# Altium PCB Prometheus_ADTC_V1.1.PcbDoc
Units mil, origin at the board's own origin, x right, y up, seen from the top; angles counter-clockwise.
Board outline 3345 x 2190 mil, 2 copper layers (Top Layer, Bottom Layer); 12 components, 7 nets, 104 pads, 0 vias.
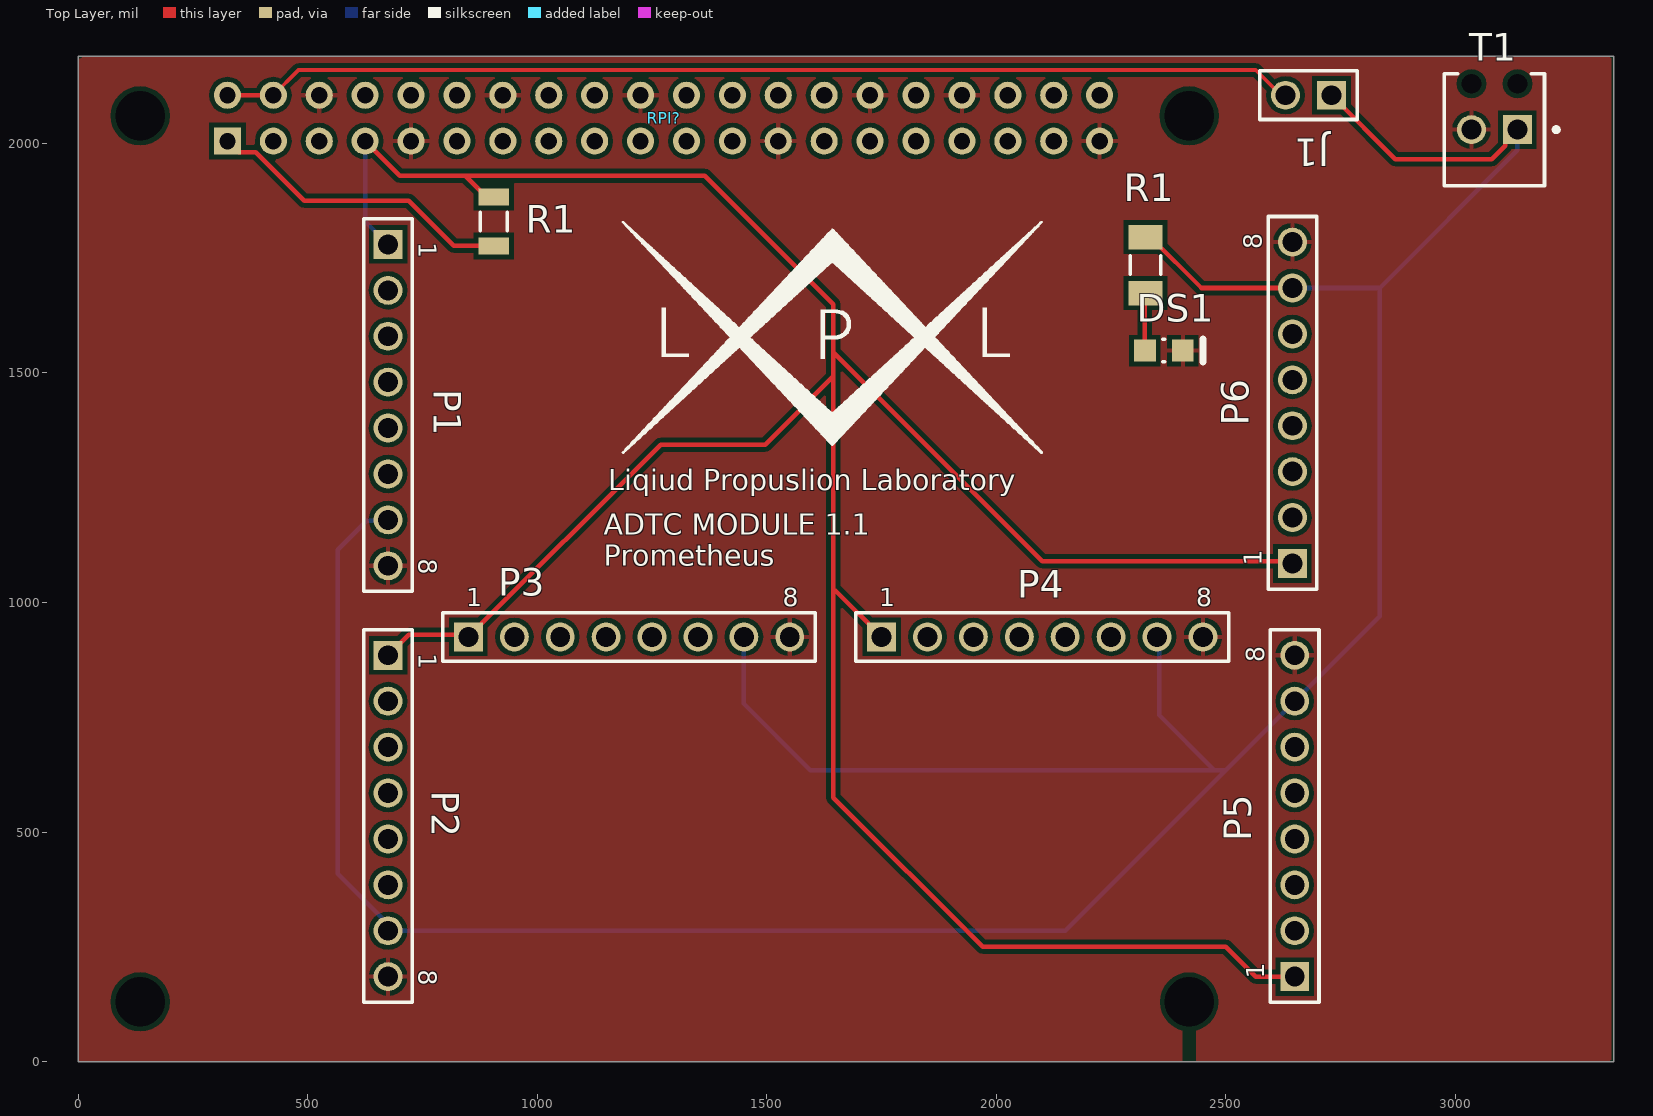
[diagram p0: Top Layer view]
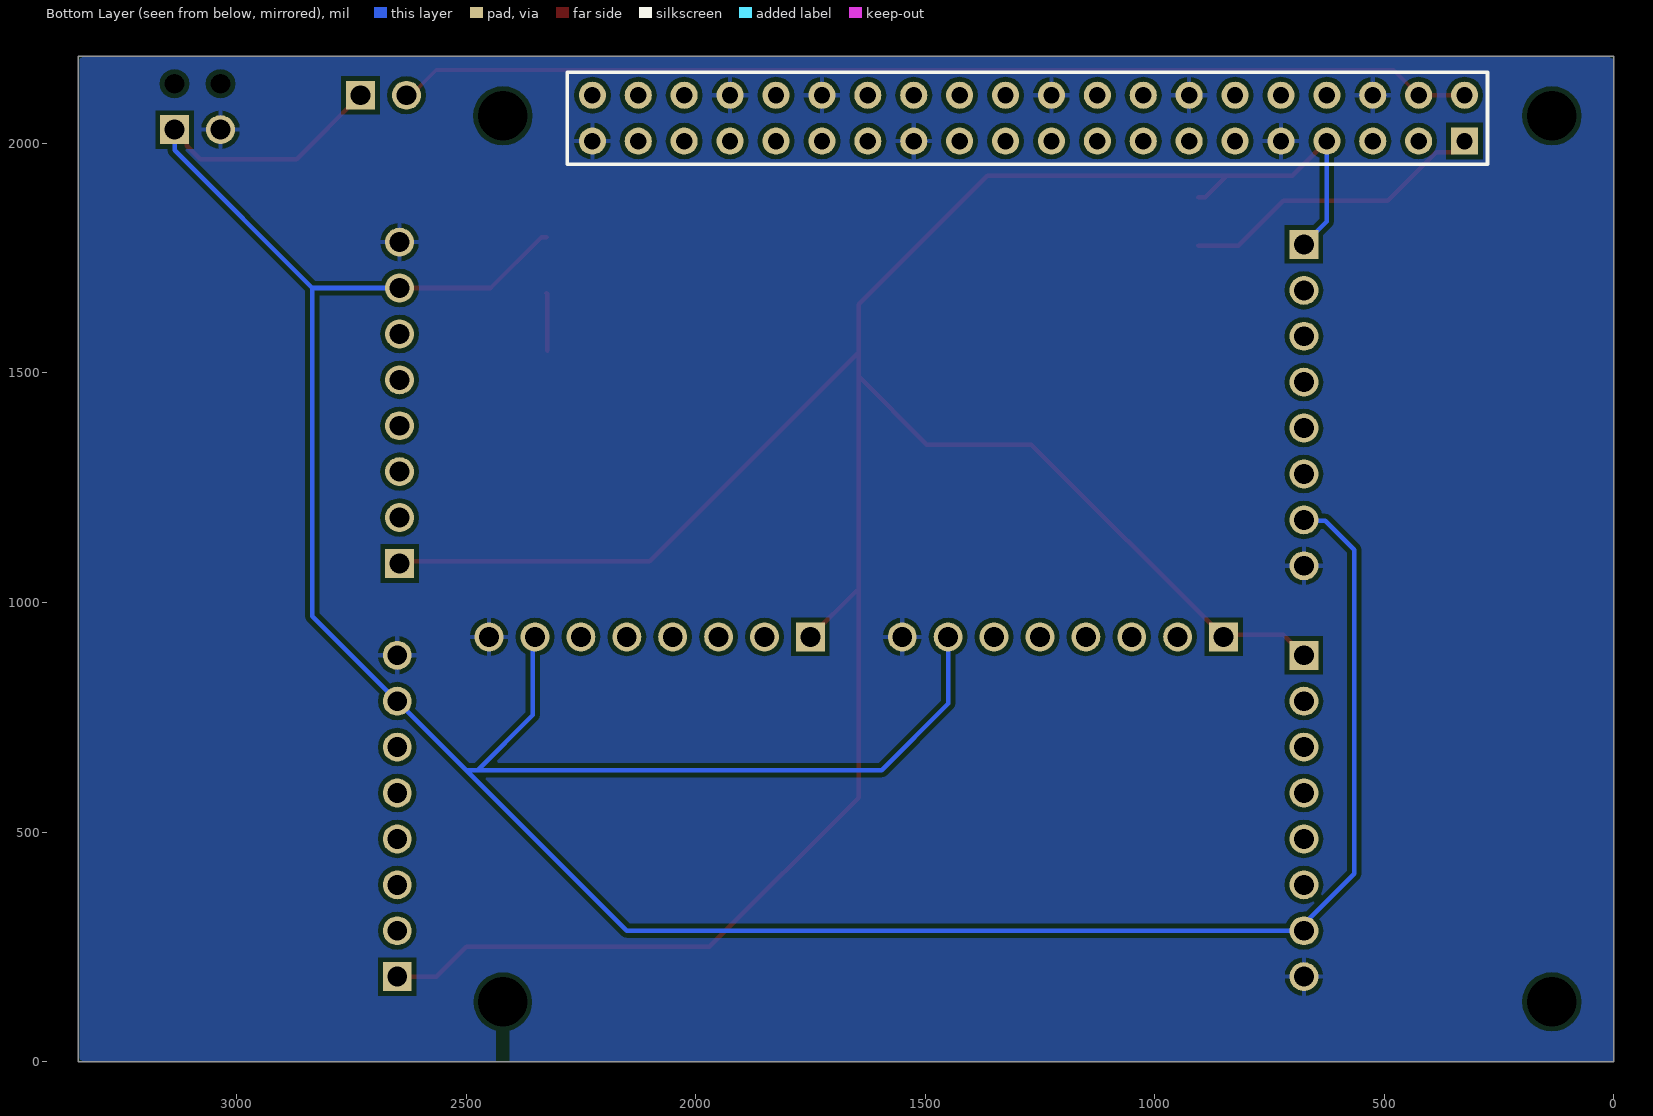
[diagram p1: Bottom Layer view, seen from below]

## Layer stack, top to bottom
Top Solder: solder mask 0.4, Solder Resist, Dk 3.5
Top Layer: signal copper 1.4
Dielectric 1: dielectric 12.6, FR-4, Dk 4.8
Bottom Layer: signal copper 1.4
Bottom Solder: solder mask 0.4, Solder Resist, Dk 3.5

## Board outline
0,0 3345,0 3345,2190 0,2190

## Design rules (kind name [scope] priority, off if disabled: settings)
Clearance [All] p1: gap=10 ignorepadtopadclearanceinfootprint=FALSE except(0: Arc-Hole Track-Hole SMDPad-Hole THPad-Hole Via-Hole Fill-Hole Poly-Hole Region-Hole Text-Hole)
HoleSize [All] p1: absolutevalues=TRUE maxlimit=200 minlimit=1 maxpercent=80.000 minpercent=20.000
PolygonConnect [All] p1: connectstyle=Relief reliefconductorwidth=10 reliefentries=4 polygonreliefangle="90 Angle" airgapwidth=10
RoomDefinition Prometheus_ADTC_V1.1 [InComponentClass('Prometheus_ADTC_V1.1')] p1: confinementstyle=ConfineIn formatcopy=TRUE lockcomponents=FALSE outline -110,-145 3735,-145 3735,2375 -110,2375
RoutingVias [All] p1: holewidth=28 width=50 viastyle="Through Hole" minholewidth=28 minwidth=50 maxholewidth=28 maxwidth=50
SolderMaskExpansion [All] p1: expansion=4
Width [All] p1: maxlimit=10 minlimit=8 preferedwidth=10 minimp=50.000000 maximp=50.000000 favimp=50.000000
29 further rules are at their usual default settings.

## Classes and differential pairs
component class Prometheus_ADTC_V1.1: DS1 J1 P1 P2 P3 P4 P5 P6 R1 RPI? T1

## Components (designator, comment, footprint, x,y, rotation, side; value= is the part's Value field where it differs from the comment)
DS1 "LTST-C170KRKT" LTST-C170KRKT_V 2365,1548.75 r0 top
J1 "61300211121" 61300211121 2680,2105 r180 top (schematic designator P?)
P1 "61300811121" 61300811121 675,1430 r270 top
P2 "61300811121" 61300811121 675,535 r270 top (schematic designator P?)
P3 "61300811121" 61300811121 1200,925 r0 top (schematic designator P?)
P4 "61300811121" 61300811121 2100,925 r0 top (schematic designator P?)
P5 "61300811121" 61300811121 2650,535 r90 top (schematic designator P?)
P6 "61300811121" 61300811121 2645,1435 r90 top (schematic designator P?)
R1 "150" RESC1206(3216)_M 2325,1735 r270 top value="1430.00 Ohm"
R1 "4K9 1% 1206(3216)" RESC1206(3216)_L 905,1830 r270 top value="4700.00 Ohm"
RPI? "RPI GPIO Connector" RPI 1275,2055 r180 top
T1 "1725656" PHOE-1725656-2 3085,2030 r180 top (schematic designator J?)

## Footprints (in the part's own frame and the unit in brackets; to place one, negate y for a bottom-side part, rotate by r counter-clockwise, add the part's x,y. Pads: shape width x height; smd on the part's side, far side on the other; paste and mask are expansions set on the pad)
61300211121 [mm] "Pin Header, pitch 2.54 mm, THT, Vertical, single row, 2p"
  rect 1.6x1.6 hole 1.1: 1(-1.27,0)
  round 1.6 hole 1.1: 2(1.27,0)
  silkscreen extent -2.69,-1.35 2.69,1.35, body extent -2.54,-1.27 2.54,1.27, height 8.57
61300811121 [mm] "Pin Header, pitch 2.54 mm, THT, Vertical, single row, 8p"
  rect 1.6x1.6 hole 1.1: 1(-8.89,0)
  round 1.6 hole 1.1: 2(-6.35,0) 3(-3.81,0) 4(-1.27,0) 5(1.27,0) 6(3.81,0) 7(6.35,0) 8(8.89,0)
  silkscreen extent -10.31,-1.35 10.31,1.35, body extent -10.16,-1.27 10.16,1.27, height 8.57
LTST-C170KRKT_V [mm] "SMD, 2-Leads, Body 2x1.25mm"
  rect 1.2x1.2 smd: 1(-1.05,0) 2(1.05,0)
  silkscreen extent -0.05,-0.64 2.16,0.64, body extent -1,-0.63 1,0.63, height 1.2
PHOE-1725656-2 [mm] "Connector, 2-Leads, Body 6.2x5.4mm, Pitch 2.54mm"
  rect 1.6x1.6 hole 1.1: 1(-1.27,0)
  round 1.6 hole 1.1: 2(1.27,0)
  round 0 hole 1.1 unplated: MH1(-1.27,-2.54) MH2(1.27,-2.54)
  silkscreen extent -3.55,-3.1 2.77,3.1, body extent -2.77,-3.1 2.77,3.1, height 9
RESC1206(3216)_L [mm] "Chip Resistor, Body 3.2x1.6mm, IPC High Density"
  rect 0.95x1.7 smd: 1(-1.35,0) 2(1.35,0)
  silkscreen extent -0.5,-0.75 0.5,0.75, body extent -1.67,-0.87 1.67,0.87, height 0.75
RESC1206(3216)_M [mm] "Chip Resistor, Body 3.2x1.6mm, IPC Low Density"
  rect 1.35x1.9 smd: 1(-1.55,0) 2(1.55,0)
  silkscreen extent -0.5,-0.85 0.5,0.85, body extent -1.67,-0.87 1.67,0.87, height 0.75
RPI [mm]
  rect 1.5x1.5 hole 0.9: 1(24.13,1.27)
  round 1.5 hole 0.9: 2(24.13,-1.27) 3(21.59,1.27) 4(21.59,-1.27) 5(19.05,1.27) 6(19.05,-1.27) 7(16.51,1.27) 8(16.51,-1.27) 9(13.97,1.27) 10(13.97,-1.27) 11(11.43,1.27) 12(11.43,-1.27) 13(8.89,1.27) 14(8.89,-1.27) 15(6.35,1.27) 16(6.35,-1.27) 17(3.81,1.27) 18(3.81,-1.27) 19(1.27,1.27) 20(1.27,-1.27) 21(-1.27,1.27) 22(-1.27,-1.27) 23(-3.81,1.27) 24(-3.81,-1.27) 25(-6.35,1.27) 26(-6.35,-1.27) 27(-8.89,1.27) 28(-8.89,-1.27) 29(-11.43,1.27) 30(-11.43,-1.27) 31(-13.97,1.27) 32(-13.97,-1.27) 33(-16.51,1.27) 34(-16.51,-1.27) 35(-19.05,1.27) 36(-19.05,-1.27) 37(-21.59,1.27) 38(-21.59,-1.27) 39(-24.13,1.27) 40(-24.13,-1.27)
  body extent -25.52,-2.63 25.53,2.38, height 8.5

## Part data
DS1: library part CMP-2000-07593-1, "LED Red, 75 mW, 54 mcd, -55 to 85 degC, 2-Pin SMD, RoHS, Tape and Reel", Case\/Package=0805, Case Code (Metric)=2012, Colour=Red, Forward Current=30mA, Forward Voltage=2V, Lens Colour=Colorless, Manufacturer=Lite-On, Max Operating Temperature=85degC, Min Operating Temperature=-55degC, Package Description="2-Pin Surface Mount Device, Body 2 x 1.25 mm", Package Quantity=1, Package Reference=C170KRKT, Power Dissipation=75mW, Test Current=20mA, Case Code (Imperial)=0805, Datasheet URL=http://optoelectronics.liteon.com/upload/download/DS-22-99-0150/LTST-C170KRKT.pdf, Datasheet Version="Rev. D, 11/2014", Depth=1.6mm, Dominant Wavelength=631nm, Height=1.1mm, Illumination Colour=Red, Lead Free=LeadFree, Length=3.2mm, Lens Style=Rectangular, Lens Transparency=Clear, Luminous Intensity=54mcd, Manufacturer URL=http://www.us.liteon.com/, Mount=SurfaceMount, Mounting Technology=SurfaceMount, Number of Elements=1, Number of LEDs=1, Number of Pins=2, Packaging=TapeandReel, Power Rating=75mW, Radiation Hardening=No, RoHSCompliant=True, Viewing Angle=130degrees, Wavelength=639nm, Width=1.25mm
J1: library part CMP-1502-01060-1, "THT Vertical Pin Header WR-PHD, Pitch 2.54 mm, Single Row, 2 pins", Contact Resistance=20mOhm, Manufacturer="Wurth Elektronik", Operating Temperature=-40to105degC, Rated Current=3A, Withstanding Voltage=500VAC, Working Voltage=250VAC, Datasheet URL=https://katalog.we-online.de/em/datasheet/6130xx11121.pdf, Gender=Male, Manufacturer URL=http://www.we-online.de, Mounting Technology=THT, Orientation=Vertical, Package Reference=61300211121, Packaging=Bag, Part Number=61300211121, Pin Number=2, Pitch=2.54mm, Publisher=WurthElektronik, Row Number=Single
P1 P2 P3 P4 P5 P6: library part CMP-1502-01076-1, "THT Vertical Pin Header WR-PHD, Pitch 2.54 mm, Single Row, 8 pins", Contact Resistance=20mOhm, Manufacturer="Wurth Elektronik", Operating Temperature=-40to105degC, Rated Current=3A, Withstanding Voltage=500VAC, Working Voltage=250VAC, Datasheet URL=https://katalog.we-online.de/em/datasheet/6130xx11121.pdf, Gender=Male, Manufacturer URL=http://www.we-online.de, Mounting Technology=THT, Orientation=Vertical, Package Reference=61300811121, Packaging=Bag, Part Number=61300811121, Pin Number=8, Pitch=2.54mm, Publisher=WurthElektronik, Row Number=Single
R1: library part CMP-1014-00526-1, "1K43 0.25W 1% 1206 (3216 Metric)  SMD", Case-EIA=1206, Case-Metric=3216, Power="0.25 W", Tolerance="1 %", Technology=SMT
R1: library part CMP-1014-00586-1, "4K7 0.25W 1% 1206 (3216 Metric)  SMD", Case-EIA=1206, Case-Metric=3216, Power="0.25 W", Tolerance="1 %", Technology=SMT
RPI?: library part "rpi connector", "GPIO Header for Raspberry Pi A+/B+/Pi 2/Pi 3 - 2x20", Manufacturer="SparkFun Electronics", Manufacturer Part Number=PRT-14017, Supplier Part Number 1=1568-1462-ND, Accessory Type=Connector, Category="Development Boards, Kits, Programmers", ComponentLink1Description=https://cdn.sparkfun.com/datasheets/Dev/RaspberryPi/12313.pdf, ComponentLink1URL=https://cdn.sparkfun.com/datasheets/Dev/RaspberryPi/12313.pdf, For Use With/Related Products="Raspberry Pi", Nils Minor=author, nilsminor@web.de=mail, Part Status=Active, Pricing 1="1=1.84 (EUR)", RoHS="RoHS Compliant", Stock 1=150, Supplier 1=Digi-Key
T1: library part CMP-2000-05299-1, "Male Header, Pitch 2.54 mm, 1 x 2 Position, Height 9 mm, Tail Length 3.5 mm", Colour=Green, Manufacturer="Phoenix Contact", Content=250pc(s), Datasheet URL=http://datasheet.octopart.com/1725656-Phoenix-Contact-datasheet-5302866.pdf, Datasheet Version=Apr-08, Industrial packaging=Yes, Manufacturer part No.=1725656, Manufacturer URL=http://www.phoenixcontact.com/, Number of contacts=2, Pitch=2.54mm, Type=MPT0,5/2-2,54

## Free pads (board coordinates)
  round 60 hole 108: 2(135,2060) 3(135,130) 4(2420,130) 5(2420,2060)

## Nets (pads, with @x,y where several pads share a name; then routed paths per layer and width w, separated by ;. In a path a pad name is that pad's centre, name@x,y a point inside that pad or via, vN(x,y) a via of type N, cw(c..) or ccw(c..) an arc to the next point about the centre after c; other vN are vias at no path point)
+5: J1.1 P1.7 P2.7 P3.7 P4.7 P5.7 P6.7 R1.1@2325,1796.02 T1.1 | length 7348.1
  Top Layer w10: R1.1@2325,1796.02 2335.83,1796.02 2446.85,1685 P6.7 ; J1.1 2869.13,1965.87 3079.37,1965.87 3108.5,1995 3108.5,2028.5 3130,2050 T1.1@3142.5,2037.5
  Bottom Layer w10: P1.7 673.5,1178.5 628.5,1178.5 565,1115 565,409.34 675,299.34 P2.7 2150,285 2500,635 ; P3.7 1450,780 1595,635 2475,635 ; P4.7 2355,920 2355,755 2475,635 ; P6.7 2835,1685 ; T1.1@3135,2055 T1.1 3135,1985 2835,1685 ; 2475,635 2500,635 ; 2500,635 P5.7 2835,970 2835,1685
DATA: P1.1 P2.1 P3.1 P4.1 P5.1 P6.1 R1.1@905,1883.15 RPI?.7 | length 6298.1
  Top Layer w10: RPI?.7 700,1930 843.39,1930 ; P2.1 720,930 845,930 P3.1 1268.75,1343.75 1496.25,1343.75 1645,1492.51 ; R1.1@905,1883.15 890.24,1883.15 843.39,1930 ; P4.1 1650,1025 1645,1025 ; P6.1 2640,1090 2100,1090 1645,1545 ; P5.1 2565,185 2500,250 1970,250 1645,575 1645,1025 ; 843.39,1930 1365,1930 1645,1650 1645,1545 ; 1645,1025 1645,1492.51 ; 1645,1492.51 1645,1545
  Bottom Layer w10: RPI?.7 625,1830 P1.1
GND: DS1.2 P1.8 P2.8 P3.8 P4.8 P5.8 P6.8 RPI?.6 RPI?.9 RPI?.14 RPI?.20 RPI?.25 RPI?.30 RPI?.34 RPI?.39 T1.2
NetDS1_1: DS1.1 R1.2@2325,1673.98 | length 125.8
  Top Layer w10: DS1.1 2323.66,1672.64 R1.2@2325,1673.98
NetJ1_2: J1.2 RPI?.2 RPI?.4 | length 2350.6
  Top Layer w8: RPI?.4 480,2160 2565,2160 J1.2@2620,2105
  Top Layer w10: RPI?.2 RPI?.4 ; J1.2@2620,2105 J1.2
NetR1_2: R1.2@905,1776.85 RPI?.1 | length 674.5
  Top Layer w10: RPI?.1 349.53,1980.47 386.56,1980.47 492.03,1875 720,1875 818.15,1776.85 R1.2@905,1776.85
Not: RPI?.40
pads on no net: P1.2 P1.3 P1.4 P1.5 P1.6 P2.2 P2.3 P2.4 P2.5 P2.6 P3.2 P3.3 P3.4 P3.5 P3.6 P4.2 P4.3 P4.4 P4.5 P4.6 P5.2 P5.3 P5.4 P5.5 P5.6 P6.2 P6.3 P6.4 P6.5 P6.6 RPI?.3 RPI?.5 RPI?.8 RPI?.10 RPI?.11 RPI?.12 RPI?.13 RPI?.15 RPI?.16 RPI?.17 RPI?.18 RPI?.19 RPI?.21 RPI?.22 RPI?.23 RPI?.24 RPI?.26 RPI?.27 RPI?.28 RPI?.29 RPI?.31 RPI?.32 RPI?.33 RPI?.35 RPI?.36 RPI?.37 RPI?.38 T1.MH1 T1.MH2

## Polygon pours and split planes (outlines as drawn)
GND on Bottom Layer "Top GND" (solid, pour order 2): 0,2190 0,0 3341.5,0 3341.5,2190
GND on Top Layer "Top GND" (solid, pour order 0): 0,2190 0,0 3340,0 3340,2190

## Silkscreen, mask and mechanical layers (free items; w line width, h text height)
Top Overlay:
  drawing of 2095 lines, arcs and shapes, not listed
  text "Liqiud Propuslion Laboratory" at 1155,1245 h45
  text "ADTC MODULE 1.1 / Prometheus" at 1145,1080 h45

## Dimensions
2420,130 to 3345,0 on Multi-Layer
3345,2190 to 3345,0 on Multi-Layer
0,2190 to 3345,2190 on Multi-Layer

## Text inside footprints (layer, text, board x,y; h text height)
P1: Top Overlay "1" at 741.93,1784.72 h40 r270; Top Overlay "8" at 741.93,1094.96 h40 r270
P2: Top Overlay "1" at 741.93,889.72 h40 r270; Top Overlay "8" at 741.93,199.96 h40 r270
P3: Top Overlay "1" at 845.28,991.93 h40; Top Overlay "8" at 1535.04,991.93 h40
P4: Top Overlay "8" at 2435.04,991.93 h40; Top Overlay "1" at 1745.28,991.93 h40
P5: Top Overlay "1" at 2583.07,180.28 h40 r90; Top Overlay "8" at 2583.07,870.04 h40 r90
P6: Top Overlay "1" at 2578.07,1080.28 h40 r90; Top Overlay "8" at 2578.07,1770.04 h40 r90